# Altium PCB PCB_capt_sup.PcbDoc
Units mm, origin at the board's own origin, x right, y up, seen from the top; angles counter-clockwise.
Board outline 5 x 19.47 mm, 2 copper layers (Top Layer, Bottom Layer); 1 components, 3 nets, 10 pads, 0 vias.
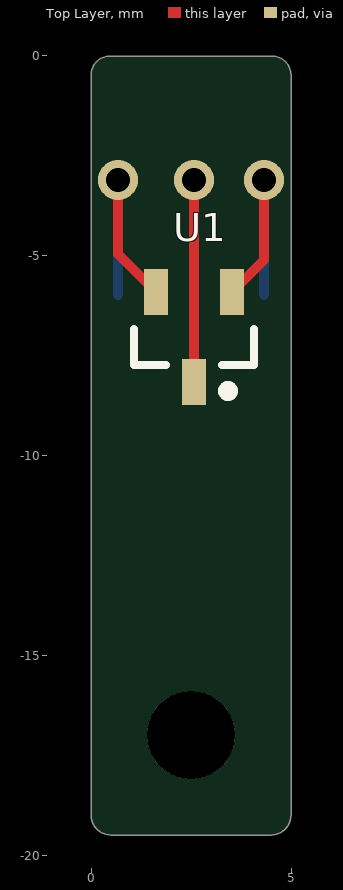
[diagram p0: Top Layer view]
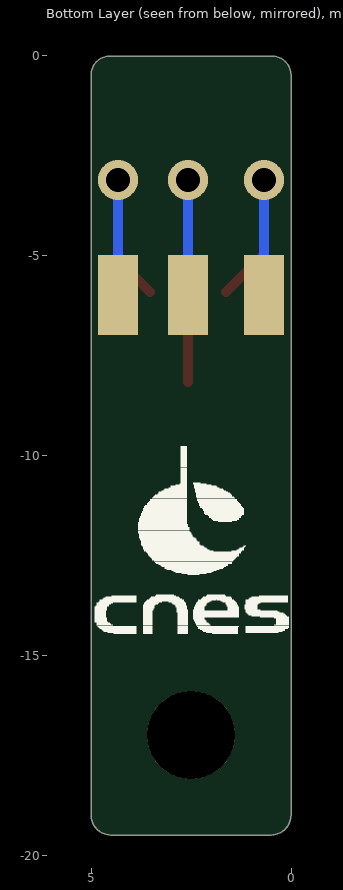
[diagram p1: Bottom Layer view, seen from below]

## Layer stack, top to bottom
Top Solder: solder mask 0.0102, Solder Resist, Dk 3.5
Top Layer: signal copper 0.0356
Dielectric1: dielectric 0.32, FR-4, Dk 4.8
Bottom Layer: signal copper 0.0356
Bottom Solder: solder mask 0.0102, Solder Resist, Dk 3.5

## Board outline
0,-19 0,-0.5 cw(c0.475,-0.5) 0.475,-0.025 4.525,-0.025 cw(c4.525,-0.5) 5,-0.5 5,-19 cw(c4.5,-19) 4.5,-19.5 0.5,-19.5 cw(c0.5,-19)

## Design rules (kind name [scope] priority, off if disabled: settings)
Clearance [All] p1: gap=0.254
PolygonConnect [All] p1: connectstyle=Relief reliefconductorwidth=0.254 reliefentries=4 polygonreliefangle="90 Angle" airgapwidth=0.254
RoutingVias [All] p1: holewidth=0.711 width=1.27 viastyle="Through Hole" minholewidth=0.711 minwidth=1.27 maxholewidth=0.711 maxwidth=1.27
SolderMaskExpansion [All] p1: expansion=0.102
Width [All] p1: maxlimit=0.254 minlimit=0.254 preferedwidth=0.254
30 further rules are at their usual default settings.

## Components (designator, comment, footprint, x,y, rotation, side; value= is the part's Value field where it differs from the comment)
U1 "7805" SOT23_N 2.575,-7.05 r270 top (schematic designator U?)

## Footprints (in the part's own frame and the unit in brackets; to place one, negate y for a bottom-side part, rotate by r counter-clockwise, add the part's x,y. Pads: shape width x height; smd on the part's side, far side on the other; paste and mask are expansions set on the pad)
SOT23_N [mm] "SOT23, 3-Leads, Body 2.9x1.3mm, Pitch 0.95mm, Lead Span 2.3mm - Reverse Pinning, IPC Medium Density"
  rect 1.15x0.6 smd: 1(1.125,0) 2(-1.125,-0.95) 3(-1.125,0.95)
  silkscreen extent -0.2,-1.5 1.47,1.5, body extent -0.7,-1.5 0.7,1.5, height 1.1

## Part data
U1: library part LM7805, "3-Terminal Positive 5V Regulator"

## Free pads (board coordinates)
  round 2.2 hole 2.2: 0(2.5,-17)
  rect 1x2 smd far side: 2(0.675,-6) 3(2.575,-6) 4(4.325,-6)
  round 1 hole 0.6: 2(0.675,-3.125) 2(2.575,-3.125) 2(4.325,-3.125)

## Nets (pads, with @x,y where several pads share a name; then routed paths per layer and width w, separated by ;. In a path a pad name is that pad's centre, name@x,y a point inside that pad or via, vN(x,y) a via of type N, cw(c..) or ccw(c..) an arc to the next point about the centre after c; other vN are vias at no path point)
GND: pad.2@2.575,-3.125 pad.3 U1.1 | length 7.9
  Top Layer w0.254: U1.1 pad.2@2.575,-3.125
  Bottom Layer w0.254: pad.3 pad.2@2.575,-3.125
OUT: pad.2@0.675,-3.125 pad.2@0.675,-6 U1.2 | length 6.1
  Top Layer w0.254: pad.2@0.675,-3.125 0.675,-4.975 U1.2
  Bottom Layer w0.254: pad.2@0.675,-6 pad.2@0.675,-3.125
VCC: pad.2@4.325,-3.125 pad.4 U1.3 | length 6
  Top Layer w0.254: U1.3 4.325,-5.125 pad.2@4.325,-3.125
  Bottom Layer w0.254: pad.4 pad.2@4.325,-3.125

## Silkscreen, mask and mechanical layers (free items; w line width, h text height)
Bottom Overlay:
  drawing of 368 lines, arcs and shapes, not listed
Mechanical 1:
  lines w0.1: 4.5,-0.025 4.525,-0.025 ; 0,-19 ccw(c0.5,-19) 0.5,-19.5 ; 0,-19 ccw(c0.5,-19) 0.5,-19.5 ; 0,-19 0,-0.5 cw(c0.475,-0.5) 0.475,-0.025 4.525,-0.025 ; 0.5,-19.5 4.5,-19.5 ; 0.5,-19.5 4.5,-19.5 ; 4.5,-19.5 ccw(c4.5,-19) 5,-19 5,-0.5 ccw(c4.525,-0.5) 4.525,-0.025